# EAGLE board piggyback (EAGLE 9.1.1)
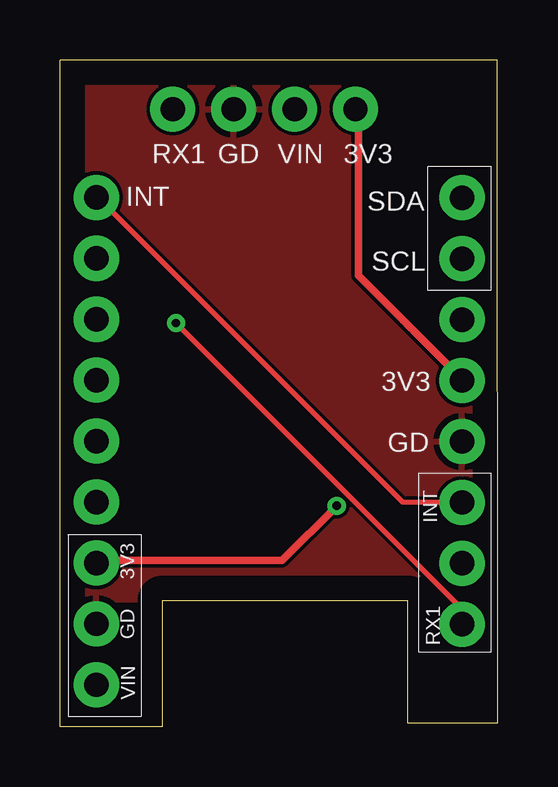
[diagram p0: board, top side]
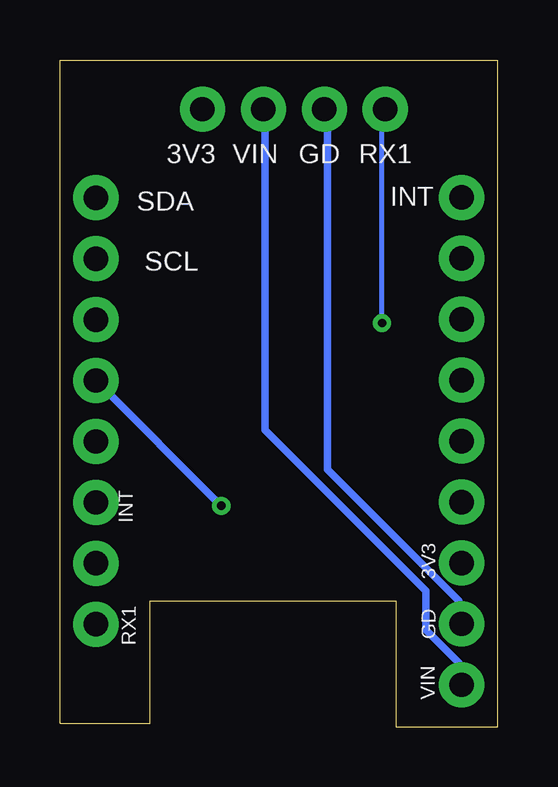
[diagram p1: board, bottom side, seen from below]

Size 18.27 x 27.8 mm. Coordinates in mm from the lower left corner, seen from the top.
Outline: 18.27,0.14 14.52,0.14 14.52,5.25 4.27,5.25 4.27,0 0.02,0 0,27.8 18.25,27.8 18.27,0.14
Copper layers (1*16): Top 0.035mm / dielectric 1.5mm / Bottom 0.035mm
Design rules "default": minimum track width 6mil, minimum drill 0.35mm, track to track 6mil, track to pad 6mil, pad to pad 6mil, via to via 6mil, smd to smd 6mil, copper to edge 40mil, drill to drill 6mil, minimum pad ring 10mil, minimum via ring 8mil, stop-mask expansion 4mil, vias tented up to drill 0mil, thermal gap 10mil

## Footprints (pad centres in the part's own frame; a part is rotated, then mirrored left to right if it is on the bottom)
1X09_NO_SILK = drill 1.016 pad 1.88: 1 0,0; 2 2.54,0; 3 5.08,0; 4 7.62,0; 5 10.16,0; 6 12.7,0; 7 15.24,0; 8 17.78,0; 9 20.32,0
1X08_NO_SILK = drill 1.016 pad 1.88: 1 0,0; 2 2.54,0; 3 5.08,0; 4 7.62,0; 5 10.16,0; 6 12.7,0; 7 15.24,0; 8 17.78,0
1X04_NO_SILK = drill 1.016 pad 1.88: 1 0,0; 2 2.54,0; 3 5.08,0; 4 7.62,0

## Placement (x,y rotation side)
J1  [1X09_NO_SILK]  1.52,1.75 90 top
J2  [1X08_NO_SILK]  16.77,4.27 90 top
J3  [1X04_NO_SILK]  12.33,25.75 180 top

## Library data of the parts
J1 = SparkFun-Connectors
J2 = SparkFun-Connectors; PROD_ID: CONN-08438
J3 = SparkFun-Connectors; PROD_ID: CONN-09696

## Nets
3V3: J1.3 J2.5 J3.1
GND: J1.2 J2.4 J3.3
INT: J1.9 J2.3
RX1: J2.1 J3.4
SCL: J2.7
SDA: J2.8
VIN: J1.1 J3.2

## Tracks (layer width: path | path; a pad name or v marks a point on that pad's centre or on a via)
3V3  (via drill 0.35)
  Top 0.152: 1.64,6.93 J1.3 | 12.46,25.67 J3.1 | 16.72,14.55 J2.5
  Top 0.305: 1.64,6.93 9.26,6.93 v11.54,9.22 | 12.46,25.67 12.46,18.82 16.72,14.55
  Bottom 0.152: 16.72,14.4 J2.5
  Bottom 0.305: 16.72,14.4 v11.54,9.22
GND
  Top 0.152: 16.72,11.96 J2.4 | 7.28,25.67 J3.3
  Bottom 0.152: 1.64,5.25 1.64,4.34 J1.2 | 7.12,25.67 J3.3
  Bottom 0.305: 1.64,5.25 7.12,10.74 7.12,25.67
  pour Top: 0.02,27.75 18.27,27.75 18.27,5.25 0.27,5.25 0.27,5.5 0.02,5.5
INT
  Top 0.152: 16.72,9.37 J2.3 | 1.64,22.02 J1.9
  Top 0.203: 16.72,9.37 14.29,9.37 1.64,22.02
RX1  (via drill 0.35)
  Top 0.152: 16.72,4.34 J2.1
  Top 0.203: v4.84,16.84 16.72,4.95 16.72,4.34
  Bottom 0.152: 4.84,25.67 J3.4
  Bottom 0.203: v4.84,16.84 4.84,25.67
VIN
  Bottom 0.152: 1.64,1.9 J1.1 | 9.71,25.67 J3.2
  Bottom 0.305: 1.64,1.9 1.64,2.66 3.01,4.03 3.01,5.67 9.71,12.37 9.71,25.67

## Text on the board
tNames: RX1 | GD | VIN | 3V3 | INT | SDA | SCL | 3V3 | GD | INT | 3V3 | GD | RX1 | VIN
bNames: RX1 | GD | VIN | 3V3 | INT | SDA | SCL | INT | 3V3 | GD | RX1 | VIN